# Altium PCB DDS_RIKEN_2014.PcbDoc (part 3 of 3)
Units mm, origin at the board's own origin, x right, y up, seen from the top; angles counter-clockwise.
Board outline 224 x 140 mm, 4 copper layers (TopLayer, Ground, Power, BottomLayer); 166 components, 282 nets, 1126 pads, 429 vias.
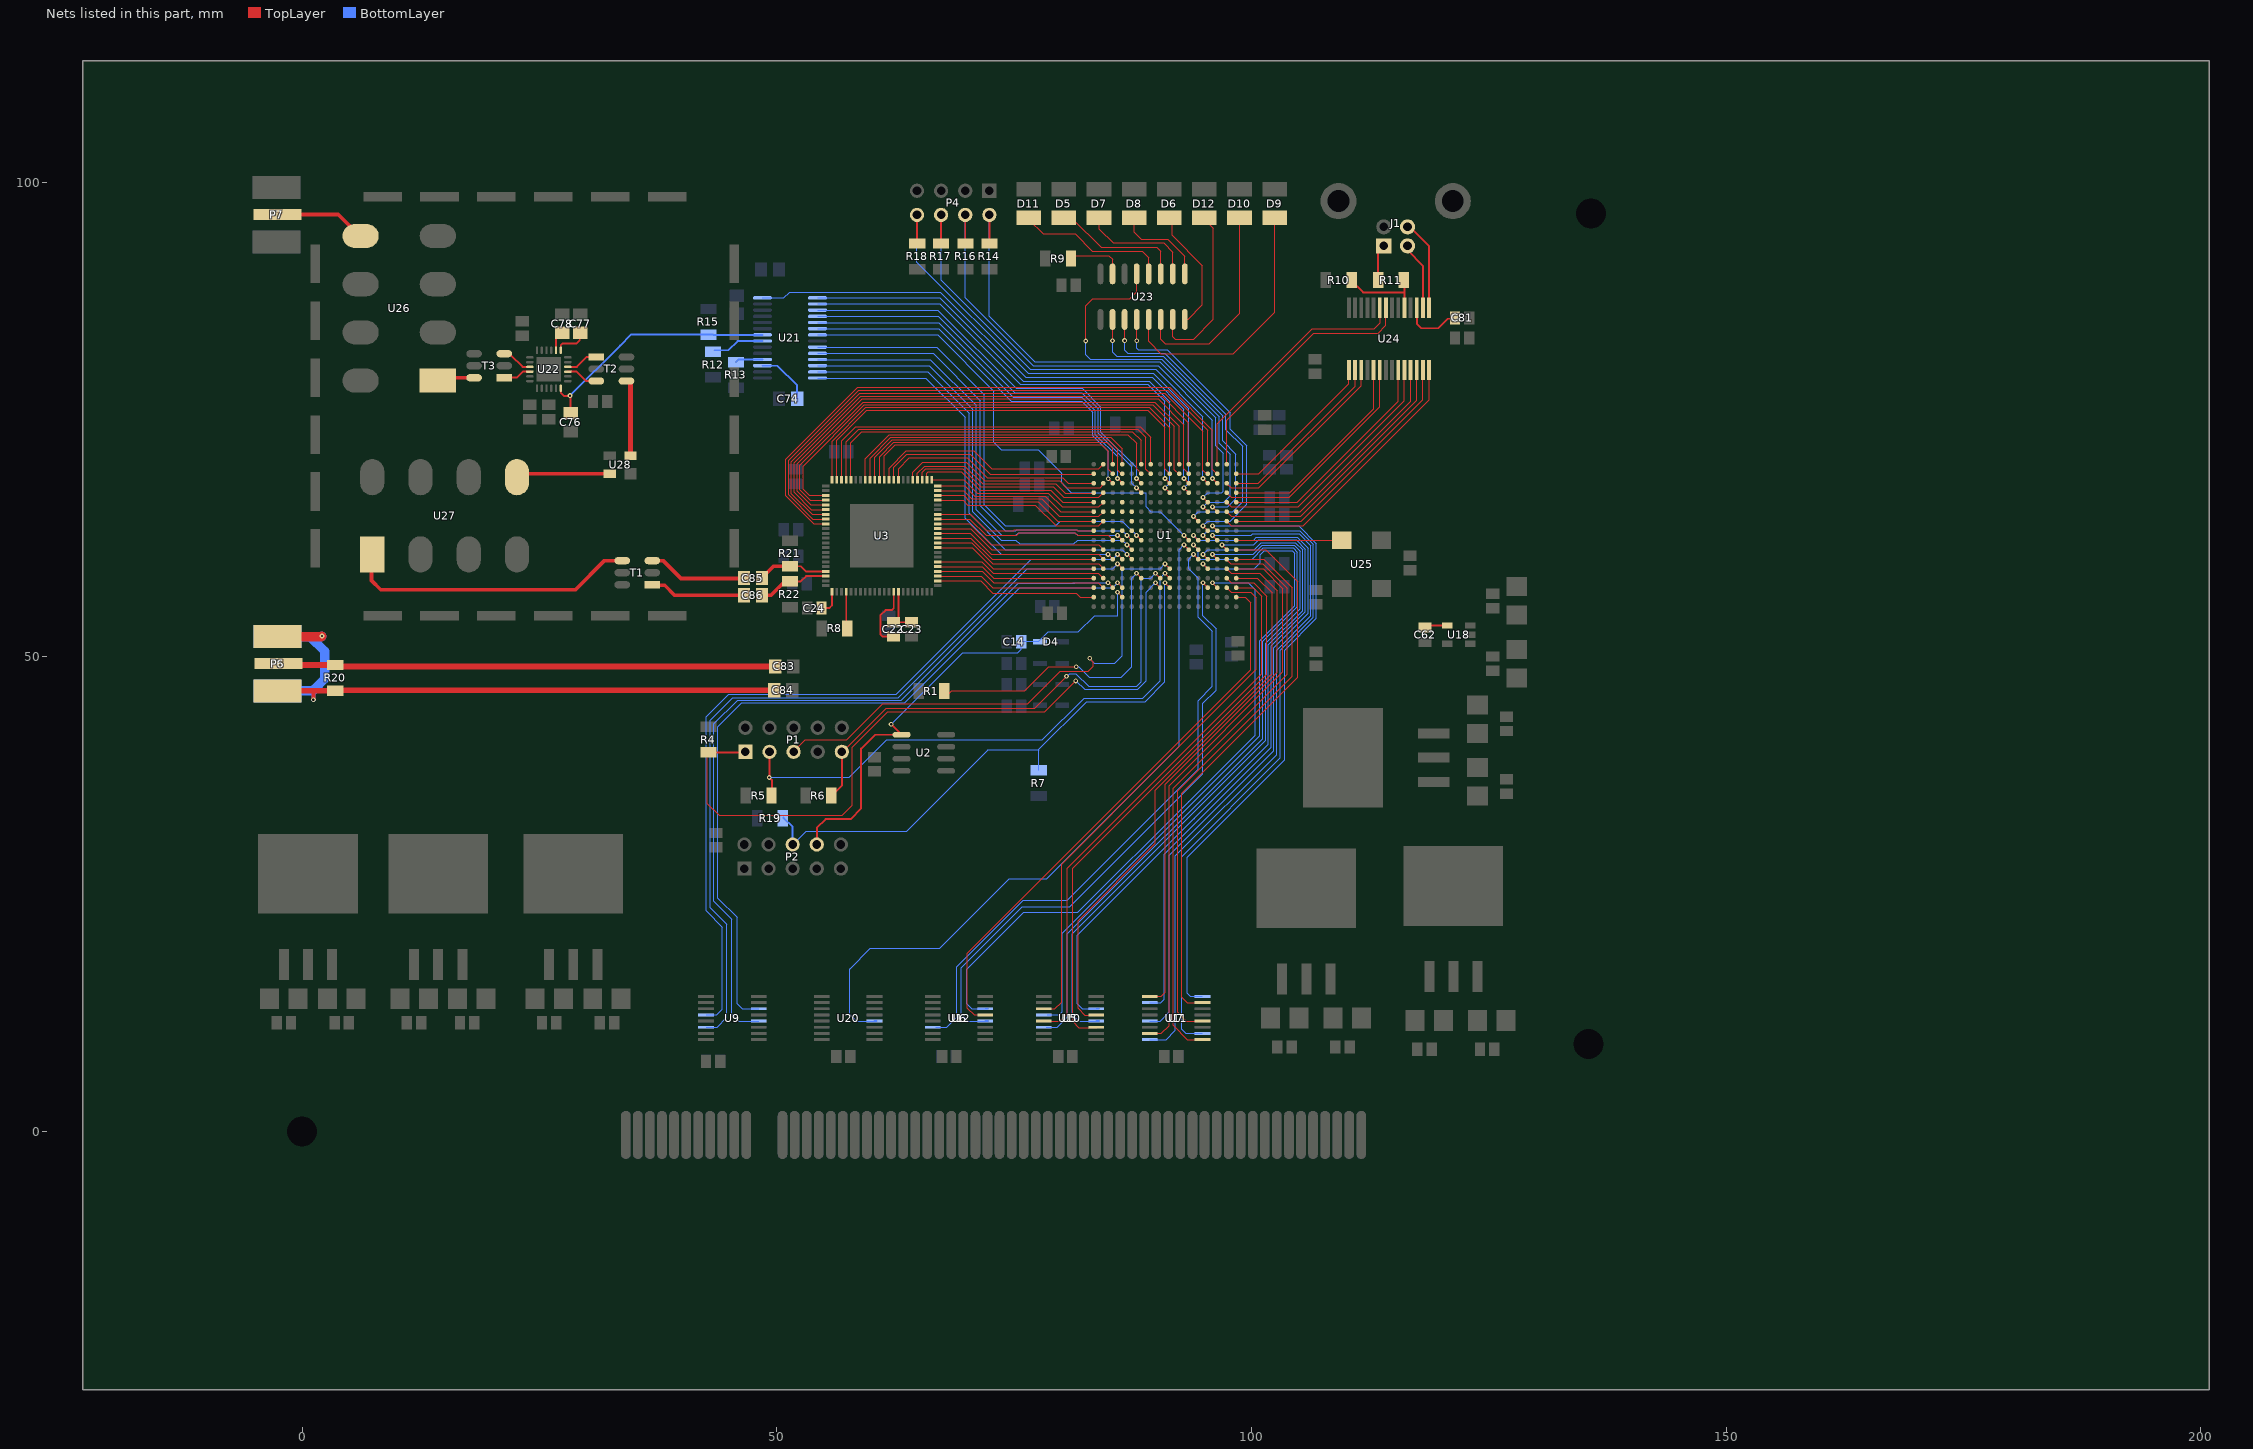
[diagram p5: the nets of this part, all layers, seen from the top]

## Via types
v1: diameter 0.5, hole 0.25, TopLayer to BottomLayer, 241 vias
v2: diameter 0.5, hole 0.25, TopLayer to BottomLayer, tented top, 114 vias
v3: diameter 1.27, hole 0.711, TopLayer to BottomLayer, 70 vias
v4: diameter 0.66, hole 0.33, TopLayer to BottomLayer, tented top, 4 vias

## Nets (pads, with @x,y where several pads share a name; then routed paths per layer and width w, separated by ;. In a path a pad name is that pad's centre, name@x,y a point inside that pad or via, vN(x,y) a via of type N, cw(c..) or ccw(c..) an arc to the next point about the centre after c; other vN are vias at no path point) (continued)
IOB3_0: U1.N3 U6.13 | length 64.2
  TopLayer w0.125: v2(94.9,57.775) U1.N3@95.4,57.275
  BottomLayer w0.125: U6.13@71.983,11.614 70.186,11.614 69.45,12.35 69.45,17.225 75.875,23.65 80.875,23.65 94.9,37.675 94.9,43.96 ; 94.9,43.65 94.9,43.96 ; v2(94.9,57.775) 94.9,54.321 96.3,52.921 96.3,46.475 94.9,45.075 94.9,43.96
  BottomLayer w0.2: U6.13@71.983,11.614 U6.13@72.282,11.614
IOB3_1: U1.P3 U6.11 | length 67.7
  TopLayer w0.125: v2(95.9,57.775) U1.P3@96.4,57.275
  BottomLayer w0.125: U6.11@71.983,12.914 70.536,12.914 70,13.45 70,17.075 76,23.075 81.725,23.075 93.547,34.897 ; 93.425,34.775 93.547,34.897 ; v2(95.9,57.775) 99.65,57.775 100.4,57.025 100.4,41.75 93.547,34.897
  BottomLayer w0.2: U6.11@71.983,12.914 U6.11@72.282,12.914
IOB3_2: U1.R3 U5.11 | length 56.8
  TopLayer w0.125: U5.11@78.182,12.889 79.264,12.889 80,13.625 80,28.15 84.909,33.059 ; U1.R3@97.4,57.275 97.9,56.775 99.925,56.775 100.5,56.2 100.5,48.65 85.875,34.025 84.909,33.059 ; 84.909,33.059 84.9,33.05 84.909,33.059
IOB3_3: U1.T3 U5.13 | length 58.3
  TopLayer w0.125: U5.13@78.182,11.589 79.789,11.589 80.6,12.4 80.6,27.7 85.234,32.334 ; 85.234,32.325 85.234,32.334 ; U1.T3@98.4,57.275 100.2,57.275 101.1,56.375 101.1,48.2 87.184,34.284 85.234,32.334
IOB3_4: U1.T2 U12.5 | length 59.3
  TopLayer w0.125: 70.075,17.4 70.075,17.284 ; U12.5@72.057,12.264 U12.5@71.983,12.264 70.786,12.264 70.075,12.975 70.075,17.284 ; U1.T2@98.375,56.275 U1.T2@98.4,56.275 99.375,56.275 99.95,55.7 99.95,48.625 81.525,30.2 70.075,18.75 70.075,17.284
IOB3_5: U1.R4 U5.3 | length 61.1
  TopLayer w0.125: U5.3@83.732,10.939 81.836,10.939 81.175,11.6 81.175,27.725 82.375,28.925 101.625,48.175 101.625,56.375 100.225,57.775 97.875,57.775 U1.R4@97.4,58.25
IOB3_6: U1.T4 U5.5 | length 59
  TopLayer w0.125: U5.5@83.732,12.239 82.461,12.239 81.75,12.95 81.75,22.175 89.9,30.325 89.9,33.359 ; 89.397,29.822 89.397,29.825 ; 89.9,33.259 89.9,33.359 ; U1.T4@98.4,58.275 100.625,58.275 102.175,56.725 102.175,48.2 101.9,47.925 89.9,35.925 89.9,33.359
IOB3_7: U1.N5 U10.5 | length 72.1
  TopLayer w0.125: v2(94.9,59.775) U1.N5@95.4,59.275
  BottomLayer w0.125: U10.5@78.5,12.275 79.75,12.275 80.1,12.625 80.1,20.875 100.875,41.65 100.875,51.675 104.575,55.375 104.575,60.9 104.3,61.175 101.375,61.175 100.95,60.75 100.95,59.9 100.325,59.275 95.4,59.275 v2(94.9,59.775)
IOB3_8: U1.N6 U10.11 | length 73.4
  TopLayer w0.125: v2(94.9,60.775) U1.N6@95.4,60.275
  BottomLayer w0.125: 81.675,16.175 81.675,20.65 94.1,33.075 ; 81.675,17.175 81.675,13.45 82.211,12.914 U10.11@83.667,12.914 ; 93.96,32.935 94.1,33.075 ; v2(94.9,60.775) 95.4,61.275 100.3,61.275 101.025,62 104.642,62 105.4,61.242 105.4,54.85 101.8,51.25 101.8,40.775 94.1,33.075
  BottomLayer w0.2: U10.11@83.667,12.914 U10.11@83.957,12.914
IOB3_9: U1.M6 U6.3 | length 67.2
  TopLayer w0.125: v2(93.9,60.775) U1.M6@94.4,60.275
  BottomLayer w0.125: U6.3@66.732,10.964 67.889,10.964 68.95,12.025 68.95,17.325 75.975,24.35 80.6,24.35 94.4,38.15 94.4,45.375 95.9,46.875 95.9,52.675 94.4,54.175 94.4,58.275 93.4,59.275 93.4,60.275 v2(93.9,60.775)
IOB3_10: U1.P6 U10.13 | length 73
  TopLayer w0.125: v2(95.9,60.775) U1.P6@96.4,60.275
  BottomLayer w0.125: 81.125,17.225 81.125,16.675 ; U10.13@83.667,11.614 81.861,11.614 81.125,12.35 81.125,16.675 ; v2(95.9,60.775) 100.197,60.775 101.147,61.725 104.528,61.725 105.125,61.128 105.125,55.05 101.5,51.425 101.5,41.175 81.125,20.8 81.125,16.675
  BottomLayer w0.2: U10.13@83.667,11.614 U10.13@83.957,11.614
IOB3_11: U1.M7 U10.3 | length 75.2
  TopLayer w0.125: v2(93.9,61.775) U1.M7@94.4,61.275
  BottomLayer w0.125: U10.3@78.407,10.964 79.564,10.964 80.625,12.025 80.625,20.8 101.2,41.375 101.2,51.6 104.85,55.25 104.85,61.014 104.414,61.45 101.261,61.45 100.086,60.275 94.4,60.275 94.4,61.275 v2(93.9,61.775)
IOB3_12: U1.R5 U7.9 | length 55.3
  TopLayer w0.125: U7.9@89.293,14.214 90.489,14.214 90.925,14.65 90.925,36.547 102.725,48.347 102.725,56.95 100.9,58.775 97.9,58.775 U1.R5@97.4,59.275
IOB3_13: U1.T5 U7.15 | length 59.1
  TopLayer w0.125: U7.15@89.293,10.314 90.514,10.314 91.325,11.125 91.325,36.425 103.325,48.425 103.325,57.15 101.225,59.25 U1.T5@98.425,59.25
IOB3_14: U1.R6 U7.1 | length 62.4
  TopLayer w0.125: U7.1@94.843,9.664 93.261,9.664 91.75,11.175 91.75,36.15 103.775,48.175 103.775,57.225 101.2,59.8 97.825,59.8 U1.R6@97.4,60.225
IOB3_15: U1.T6 U7.4 | length 59.9
  TopLayer w0.125: U7.4@94.843,11.614 93.136,11.614 92.225,12.525 92.225,35.875 104.3,47.95 104.3,57.275 101.3,60.275 U1.T6@98.4,60.275 U1.T6@98.375,60.275
IOB3_16: U1.L7 U20.13 | length 74.5
  TopLayer w0.125: v2(92.9,61.775) U1.L7@93.4,61.275
  BottomLayer w0.125: 57.7,17.125 57.7,12.35 58.436,11.614 U20.13@60.299,11.614 ; 57.725,17.15 59.875,19.3 67.175,19.3 74.5,26.625 78.45,26.625 92.4,40.575 92.4,54.71 ; 92.4,54.575 92.4,54.71 ; v2(92.9,61.775) 92.4,61.275 92.4,54.71
  BottomLayer w0.2: U20.13@60.299,11.614 U20.13@60.532,11.614
IOB3_17: U1.R7 U11.7 | length 65.4
  TopLayer w0.125: v2(96.9,61.775) U1.R7@97.4,61.275
  BottomLayer w0.125: U11.7@89.293,13.564 90.464,13.564 90.825,13.925 90.825,29.2 102.1,40.475 102.1,51.15 105.7,54.75 105.7,61.331 104.731,62.3 100.8,62.3 100.275,61.775 v2(96.9,61.775)
IOB3_18: U1.T7 U7.7 | length 59.1
  TopLayer w0.125: U7.7@94.843,13.564 93.261,13.564 92.675,14.15 92.675,35.625 104.875,47.825 104.875,57.9 101.5,61.275 U1.T7@98.4,61.275
IOB3_19: U1.L8 U21.7 | length 52.9
  TopLayer w0.125: v2(92.9,62.775) U1.L8@93.4,62.275
  BottomLayer w0.125: U21.7@54.3,83.9 66.95,83.9 72.875,77.975 72.875,75.85 ; 72.875,76.1 72.875,75.85 ; v2(92.9,62.775) 90.4,65.275 89.4,65.275 88.9,65.775 88.9,67.275 81.05,67.275 80.025,68.3 80.025,69.3 77.525,71.8 73.65,71.8 72.875,72.575 72.875,75.85
IOB3_20: U1.M8 U11.4 | length 72.1
  TopLayer w0.125: v2(93.9,62.775) U1.M8@94.4,62.275
  BottomLayer w0.125: U11.4@89.293,11.614 90.389,11.614 91.35,12.575 91.35,15.4 ; 91.35,16.55 91.35,15.4 ; v2(93.9,62.775) 94.4,62.275 100.225,62.275 100.525,62.575 104.845,62.575 105.975,61.445 105.975,54.55 102.375,50.95 102.375,40.1 91.35,29.075 91.35,15.4
IOB3_21: U1.N8 U11.15 | length 72.9
  TopLayer w0.125: v2(94.9,62.775) U1.N8@95.4,62.275
  BottomLayer w0.125: 92.65,16.55 92.65,16.075 ; 92.65,26.525 92.65,26.475 ; U11.15@94.843,10.314 93.086,10.314 92.65,10.75 92.65,16.075 ; v2(94.9,62.775) 95.4,63.275 105.075,63.275 106.525,61.825 106.525,54.15 103.05,50.675 103.05,39.35 92.65,28.95 92.65,26.475 ; 92.65,16.075 92.65,26.475
IOB3_22: U1.P8 U11.1 | length 72.1
  TopLayer w0.125: v2(95.9,62.775) U1.P8@96.4,62.275
  BottomLayer w0.125: U11.1@89.293,9.664 91.014,9.664 92,10.65 92,16.133 ; 92,16.55 92,16.133 ; 92,29 92,16.133 ; 92,29.025 102.65,39.675 102.65,50.7 106.25,54.3 106.25,61.7 105.025,62.925 100.15,62.925 100,62.775 v2(95.9,62.775)
IOB4_0: U1.N9 U23.4 | length 32.3
  TopLayer w0.125: v1(87.915,83.29) U23.4@87.915,85.525 ; v2(94.9,63.775) U1.N9@95.4,63.275
  BottomLayer w0.125: v1(87.915,83.29) 87.915,82.485 88.075,82.325 91.125,82.325 97.75,75.7 97.75,73.975 99.525,72.2 99.525,66.05 97.75,64.275 95.4,64.275 v2(94.9,63.775)
IOB4_1: U1.R10 U24.14 | length 30.2
  TopLayer w0.125: U1.R10@97.4,64.25 97.875,63.775 105.45,63.775 118.725,77.05 U24.14@118.725,80.2
IOB4_2: U1.T10 U24.13 | length 28.1
  TopLayer w0.125: U1.T10@98.4,64.275 105.275,64.275 118.075,77.075 U24.13@118.075,80.2
IOB4_3: U1.R11 U24.12 | length 28.5
  TopLayer w0.125: U1.R11@97.4,65.275 97.9,64.775 105.2,64.775 117.425,77 U24.12@117.425,80.2
IOB4_4: U1.T11 U24.11 | length 26.5
  TopLayer w0.125: U1.T11@98.4,65.275 105.125,65.275 116.775,76.925 U24.11@116.775,80.2
IOB4_5: U1.R12 U24.10 | length 26.8
  TopLayer w0.125: U1.R12@97.425,66.25 97.9,65.775 104.95,65.775 116.125,76.95 U24.10@116.125,80.2
IOB4_6: U1.T12 U24.9 | length 24.8
  TopLayer w0.125: U1.T12@98.4,66.25 104.825,66.25 115.475,76.9 U24.9@115.475,80.2
IOB4_7: U1.P9 U11.9 | length 67.1
  TopLayer w0.125: v2(95.9,63.775) U1.P9@96.4,63.275
  BottomLayer w0.125: U11.9@94.843,14.214 93.586,14.214 93.25,14.55 93.25,28.875 103.5,39.125 103.5,50.675 106.85,54.025 106.85,61.889 104.964,63.775 v2(95.9,63.775)
IOB4_8: U1.P11 U23.2 | length 30.7
  TopLayer w0.125: v1(85.375,83.275) U23.2@85.375,85.525 ; v2(95.9,65.775) U1.P11@96.4,65.275
  BottomLayer w0.125: v1(85.375,83.275) 85.375,82.075 85.8,81.65 90.725,81.65 96.975,75.4 96.975,72.725 98.375,71.325 98.375,66.625 97.525,65.775 v2(95.9,65.775)
IOB4_9: U1.R13 U24.6 | length 24.2
  TopLayer w0.125: U1.R13@97.375,67.275 97.875,66.775 103.975,66.775 113.525,76.325 U24.6@113.525,80.2
IOB4_10: U1.T13 U24.5 | length 22.2
  TopLayer w0.125: U1.T13@98.4,67.275 104.05,67.275 112.875,76.1 U24.5@112.875,80.2
IOB4_11: U1.M10 U23.3 | length 33.2
  TopLayer w0.125: v1(86.645,83.295) U23.3@86.645,85.525 ; v2(93.9,64.775) U1.M10@94.4,64.275
  BottomLayer w0.125: v1@86.65,83.325 86.65,82.3 86.975,81.975 90.9,81.975 97.325,75.55 97.325,73.9 99.075,72.15 99.075,66.3 98.05,65.275 94.4,65.275 v2(93.9,64.775)
IOB4_12: U1.N11 U23.13 | length 42.7
  TopLayer w0.125: v1(82.55,83.25) 82.55,86.95 83.3,87.7 87.2,87.7 87.915,88.415 U23.13@87.915,90.325 ; v2(94.9,65.775) U1.N11@95.4,65.275
  BottomLayer w0.125: v1(82.55,83.25) 82.55,81.825 83.05,81.325 90.55,81.325 96.6,75.275 96.6,72.5 97.8,71.3 97.8,66.95 97.1,66.25 95.4,66.25 v2@94.925,65.775
IOB4_13: U1.T14 U24.2 | length 18.5
  TopLayer w0.125: U1.T14@98.4,68.25 100.7,68.25 110.925,78.475 U24.2@110.925,80.2
IOB4_14: U1.T15 U24.1 | length 17.3
  TopLayer w0.125: U1.T15@98.375,69.275 U1.T15@98.4,69.275 100.8,69.275 110.275,78.75 U24.1@110.275,80.2
IOB4_15: P4.2 R14.1 U1.N12 | length 53.2
  TopLayer w0.125: v2(94.9,66.775) U1.N12@95.4,66.275
  TopLayer w0.2: R14.1@72.4,93.525 P4.2@72.4,96.535
  BottomLayer w0.125: P4.2@72.4,96.535 72.4,85.85 77.2,81.05 90.35,81.05 96.25,75.15 96.25,72.225 97.05,71.425 97.05,71.325 97.05,67.425 96.9,67.275 95.4,67.275 v2(94.9,66.775)
IOB4_16: P4.4 R16.1 U1.P14 | length 50.2
  TopLayer w0.125: v2(95.9,68.775) U1.P14@96.4,68.275
  TopLayer w0.2: R16.1@69.86,93.465 P4.4@69.86,96.535
  BottomLayer w0.125: P4.4@69.86,96.535 69.86,87.79 77,80.65 90.175,80.65 95.9,74.925 95.9,73.1 ; v2(95.9,68.775) 95.9,71.75 ; 95.9,71.825 95.9,71.75 ; 95.9,73.214 95.9,73.1 ; 95.9,71.75 95.9,73.1
IOB4_17: U1.R14 U24.3 | length 20.4
  TopLayer w0.125: U1.R14@97.425,68.225 97.875,67.775 100.8,67.775 111.575,78.55 U24.3@111.575,80.2
IOB5_0: P4.6 R17.1 U1.N14 | length 50.9
  TopLayer w0.125: v2(94.9,68.775) U1.N14@95.4,68.275
  TopLayer w0.2: R17.1@67.32,93.505 P4.6@67.32,96.535
  BottomLayer w0.125: P4.6@67.32,96.535 67.32,89.63 76.7,80.25 89.925,80.25 94.9,75.275 94.9,73.575 ; v2(94.9,68.775) 94.9,73.575 ; 94.9,73.825 94.9,73.575
IOB5_1: U1.P15 U3.31 | length 64.1
  TopLayer w0.125: U3.31@55.178,63.989 53.89,63.989 50.95,66.929 50.95,70.796 58.529,78.375 91.4,78.375 95.9,73.875 95.9,69.725 U1.P15@96.4,69.225
IOB5_2: U1.P16 U24.23 | length 27.3
  TopLayer w0.125: U1.P16@96.4,70.275 96.4,74.55 106.4,84.55 112.95,84.55 113.55,85.15 U24.23@113.55,86.675
IOB5_3: U1.R16 U24.22 | length 27.2
  TopLayer w0.125: U1.R16@97.4,70.275 97.4,74.9 106.575,84.075 113.35,84.075 114.175,84.9 U24.22@114.175,86.55
IOB5_4: U1.N16 U3.30 | length 61.1
  TopLayer w0.125: U3.30@55.178,64.489 53.815,64.489 51.25,67.054 51.25,70.671 58.629,78.05 91.175,78.05 95.4,73.825 U1.N16@95.4,70.25
IOB5_5: U1.N15 U3.29 | length 60.6
  TopLayer w0.125: U3.29@55.178,64.989 55.167,65 53.728,65 51.55,67.178 51.55,70.547 58.728,77.725 90.9,77.725 94.9,73.725 94.9,69.65 95.275,69.275 U1.N15@95.4,69.275 U1.N15@95.425,69.275
IOB5_6: U1.L14 U21.28 | length 57.9
  TopLayer w0.125: v2(92.9,68.775) U1.L14@93.4,68.275
  BottomLayer w0.125: U21.28@48.5,87.8 50.75,87.8 51.35,88.4 67.25,88.4 76.225,79.425 89.55,79.425 92.9,76.075 92.9,73.075 ; v2(92.9,68.775) 92.9,73.075 ; 92.9,73.2 92.9,73.075
IOB5_7: P4.8 R18.1 U1.L13 | length 52.4
  TopLayer w0.125: v2(92.9,67.775) U1.L13@93.4,67.275
  TopLayer w0.2: R18.1@64.78,93.47 P4.8@64.78,96.535
  BottomLayer w0.125: P4.8@64.775,96.525 64.775,91.55 76.475,79.85 89.675,79.85 93.4,76.125 93.4,73.111 ; v2(92.9,67.775) 93.4,68.275 93.4,73.111 ; 93.4,73.2 93.4,73.111
IOB5_8: U1.L16 U3.28 | length 57.2
  TopLayer w0.125: U3.28@55.178,65.489 53.663,65.489 51.85,67.302 51.85,70.423 58.852,77.425 90.6,77.425 93.375,74.65 U1.L16@93.375,70.25
IOB5_9: U1.L15 U3.27 | length 56.5
  TopLayer w0.125: U3.27@55.178,65.989 53.587,65.989 52.15,67.426 52.15,70.299 59.001,77.15 90.2,77.15 92.9,74.45 92.9,69.775 U1.L15@93.375,69.3
IOB5_10: U1.K16 U3.26 | length 53.6
  TopLayer w0.125: U3.26@55.178,66.489 53.512,66.489 52.475,67.526 52.475,67.55 52.45,67.575 52.45,70.174 59.101,76.825 89.825,76.825 92.4,74.25 U1.K16@92.4,70.25
IOB5_11: U1.K15 U3.25 | length 53.1
  TopLayer w0.125: U3.25@55.178,66.989 55.167,67 53.425,67 52.775,67.65 52.775,70.075 59.225,76.525 89.625,76.525 91.9,74.25 91.9,69.7 92.325,69.275 U1.K15@92.4,69.275 U1.K15@92.425,69.275
IOB5_12: U1.J16 U3.22 | length 45.8
  TopLayer w0.125: U3.22@55.83,68.641 55.83,72.705 59.375,76.25 89.25,76.25 91.4,74.1 91.4,70.35 U1.J16@91.375,70.325
IOB5_13: U1.J15 U3.21 | length 45.8
  TopLayer w0.125: U3.21@56.33,68.641 56.33,72.78 59.5,75.95 89.1,75.95 90.9,74.15 90.9,69.775 U1.J15@91.375,69.3
IOB5_14: U1.J14 U21.2 | length 49.9
  TopLayer w0.125: v2(90.9,68.775) U1.J14@91.4,68.275
  BottomLayer w0.125: U21.2@54.3,87.15 67.2,87.15 75.65,78.7 89.1,78.7 90.9,76.9 90.9,73.9 ; v2(90.9,68.775) 90.9,73.9 ; 90.9,74.15 90.9,73.9
IOB5_15: U1.J13 U21.1 | length 51.7
  TopLayer w0.125: v2(90.9,67.775) U1.J13@91.4,67.275
  BottomLayer w0.125: U21.1@54.3,87.8 67.175,87.8 75.95,79.025 89.225,79.025 91.4,76.85 91.4,74.15 ; v2(90.9,67.775) 91.4,68.275 91.4,74.15 ; 91.4,74.225 91.4,74.15
IOB6_0: U1.G16 U3.20 | length 40.6
  TopLayer w0.125: U3.20@56.83,68.641 56.83,72.73 58.325,74.225 88.3,74.225 89.4,73.125 89.4,70.3 U1.G16@89.35,70.25
IOB6_1: U1.G15 U3.19 | length 40.5
  TopLayer w0.125: U3.19@57.33,68.641 57.33,72.655 58.625,73.95 88.05,73.95 88.9,73.1 88.9,69.725 89.325,69.3 U1.G15@89.4,69.3
IOB6_2: U1.F13 U21.4 | length 44.3
  TopLayer w0.125: v2(87.9,67.775) U1.F13@88.4,67.275
  BottomLayer w0.125: U21.4@54.3,85.85 67.025,85.85 75.05,77.825 82.125,77.825 83.85,76.1 83.85,73.55 87.4,70 87.4,68.275 v2(87.9,67.775)
IOB6_3: U1.F16 U3.18 | length 37.8
  TopLayer w0.125: U3.18@57.83,68.641 57.825,68.646 57.825,72.525 58.975,73.675 87.475,73.675 88.375,72.775 88.375,70.35 U1.F16@88.425,70.3
IOB6_4: U1.F15 U3.15 | length 35.6
  TopLayer w0.125: U3.15@59.33,68.641 59.33,70.852 61.878,73.4 86.975,73.4 87.9,72.475 87.9,70.482 87.9,69.775 U1.F15@88.4,69.275
IOB6_5: U1.B16 U3.10 | length 25.5
  TopLayer w0.125: U3.10@61.83,68.641 61.83,69.854 63.651,71.675 70.775,71.675 72.675,69.775 83.9,69.775 U1.B16@84.375,70.25
IOB6_6: U1.F14 U21.3 | length 43.8
  TopLayer w0.125: v2(87.9,68.775) U1.F14@88.4,68.275
  BottomLayer w0.125: U21.3@54.3,86.5 66.975,86.5 75.225,78.25 82.175,78.25 84.15,76.275 84.15,73.65 87.9,69.9 v2(87.9,68.775)
IOB6_7: U1.D16 U3.14 | length 31.9
  TopLayer w0.125: U3.14@59.83,68.641 59.83,70.928 62.027,73.125 85.175,73.125 86.4,71.9 U1.D16@86.4,70.25
IOB6_8: U1.D15 U3.13 | length 32
  TopLayer w0.125: U3.13@60.33,68.641 60.33,71.004 62.176,72.85 84.924,72.85 85.9,71.874 85.9,69.65 86.275,69.275 U1.D15@86.375,69.275
IOB6_9: U1.C16 U3.12 | length 29.6
  TopLayer w0.125: U3.12@60.83,68.641 60.83,71.079 62.326,72.575 84.775,72.575 85.375,71.975 85.375,70.3 U1.C16@85.35,70.275
IOB6_10: U1.C15 U3.11 | length 29.4
  TopLayer w0.125: U3.11@61.33,68.641 61.33,71.155 62.475,72.3 84.25,72.3 84.9,71.65 84.9,69.75 U1.C15@85.375,69.275
IOB7_0: U1.C14 U21.6 | length 41
  TopLayer w0.125: v2(84.925,68.75) U1.C14@85.4,68.275
  BottomLayer w0.125: U21.6@54.3,84.55 67.05,84.55 74.7,76.9 82.125,76.9 83.3,75.725 83.3,75.475 83.3,73.25 84.925,71.625 v2(84.925,68.75)
IOB7_1: U1.D14 U21.5 | length 41.9
  TopLayer w0.125: v2(85.9,68.775) U1.D14@86.4,68.275
  BottomLayer w0.125: U21.5@54.3,85.2 67.05,85.2 74.9,77.35 82.125,77.35 83.575,75.9 83.575,73.364 85.9,71.039 v2(85.9,68.775)
IOB7_2: U1.D11
IOB7_3: U1.D12
IOB7_4: U1.A13 U3.4 | length 20.7
  TopLayer w0.125: U3.4@64.83,68.641 64.83,69.33 65.575,70.075 69.825,70.075 71.7,68.2 79.4,68.2 80.375,67.225 U1.A13@83.375,67.225
IOB7_5: U1.B13 U3.3 | length 21.4
  TopLayer w0.125: U3.3@65.33,68.641 65.33,69.405 65.7,69.775 69.574,69.775 71.474,67.875 79.125,67.875 80.225,66.775 83.9,66.775 U1.B13@84.4,67.275
IOB7_6: U1.A14 U3.8 | length 23.3
  TopLayer w0.125: U3.8@62.83,68.641 62.83,69.805 63.975,70.95 70.075,70.95 72.175,68.85 80.144,68.85 80.719,68.275 83.375,68.275 U1.A14@83.4,68.25
IOB7_7: U1.B14 U3.5 | length 22.6
  TopLayer w0.125: U3.5@64.33,68.641 64.33,69.43 65.375,70.475 69.975,70.475 71.925,68.525 79.8,68.525 80.513,67.812 84.062,67.812 84.4,68.15 U1.B14@84.4,68.225
IOB7_8: U1.E11
IOB7_9: U1.E10
IOB7_10: U1.A12 U3.2 | length 19.6
  TopLayer w0.125: U3.2@65.83,68.641 65.83,69.33 65.975,69.475 69.45,69.475 71.375,67.55 78.875,67.55 80.15,66.275 U1.A12@83.375,66.275
IOB7_11: U1.B12 U3.1 | length 19.4
  TopLayer w0.125: U3.1@66.33,68.641 69.709,68.641 71.125,67.225 78.625,67.225 80.075,65.775 83.925,65.775 U1.B12@84.375,66.225
IOB7_12: U1.A11 U3.88 | length 17.6
  TopLayer w0.125: U3.88@66.982,67.989 69.786,67.989 70.85,66.925 78.275,66.925 79.925,65.275 U1.A11@83.4,65.275 U1.A11@83.425,65.25
IOB7_13: U1.B11 U3.87 | length 18.7
  TopLayer w0.125: U3.87@66.982,67.489 69.686,67.489 70.55,66.625 77.925,66.625 79.775,64.775 83.925,64.775 84.375,65.225 U1.B11@84.375,65.25
IOB7_14: U1.C11
IOB7_15: U1.A15 U3.9 | length 23.8
  TopLayer w0.125: U3.9@62.33,68.641 62.33,69.93 63.7,71.3 70.375,71.3 72.475,69.2 83.35,69.2 U1.A15@83.4,69.25
IOB7_16: U1.F9
IOB7_17: U1.A10 U3.86 | length 17.6
  TopLayer w0.125: U3.86@66.982,66.989 69.686,66.989 70.35,66.325 77.525,66.325 79.6,64.25 U1.A10@83.4,64.25
IOB7_18: U1.B10 U3.85 | length 18.7
  TopLayer w0.125: U3.85@66.982,66.489 69.636,66.489 70.15,65.975 77.25,65.975 79.45,63.775 83.9,63.775 U1.B10@84.4,64.275
IOB7_19: U1.C9
IOB7_20: U1.D9
IOB7_21: U1.E9
IOB8_0: U1.C8 U3.81 | length 19.6
  TopLayer w0.125: U3.81@66.982,64.489 70.336,64.489 72.05,62.775 75.263,62.775 75.563,63.075 81.388,63.075 81.687,62.775 84.9,62.775 U1.C8@85.4,62.275
IOB8_1: U1.D8 U21.11 | length 46.8
  TopLayer w0.125: v2(85.9,62.775) U1.D8@86.4,62.275
  BottomLayer w0.125: U21.11@54.3,81.3 66.2,81.3 71,76.5 71,74.075 ; 71,74.15 71,74.075 ; v2(85.9,62.775) 81.7,62.775 81.4,63.075 75.5,63.075 75.2,62.775 73.7,62.775 71,65.475 71,74.075
IOB8_2: U1.E8 U21.10 | length 47.9
  TopLayer w0.125: v2(86.9,62.775) U1.E8@87.4,62.275
  BottomLayer w0.125: U21.10@54.3,81.95 66.475,81.95 71.45,76.975 71.45,74.1 ; 71.45,74.15 71.45,74.1 ; v2(86.9,62.775) 86.4,63.275 81.7,63.275 81.6,63.375 75.3,63.375 75.2,63.275 74.05,63.275 71.45,65.875 71.45,74.1
IOB8_3: U1.F8 U21.9 | length 50
  TopLayer w0.125: v2(87.9,62.775) U1.F8@88.4,62.275
  BottomLayer w0.125: U21.9@54.3,82.6 66.85,82.6 71.875,77.575 71.875,77.111 ; 71.875,74.15 71.875,74.011 ; 71.875,77.275 71.875,77.111 ; v2(87.9,62.775) 86.4,64.275 79.875,64.275 79.375,63.775 74.1,63.775 71.875,66 71.875,74.011 ; 71.875,74.011 71.875,77.111
IOB8_4: U1.A7 U3.79 | length 17.3
  TopLayer w0.125: U3.79@66.982,63.489 70.436,63.489 72.65,61.275 83.375,61.275 U1.A7@83.4,61.25
IOB8_5: U1.B7 U3.80 | length 18.5
  TopLayer w0.125: U3.80@66.982,63.989 70.36,63.989 72.574,61.775 83.9,61.775 U1.B7@84.4,61.275
IOB8_6: U1.C6 U21.14 | length 45.3
  TopLayer w0.125: v2(84.9,60.775) U1.C6@85.4,60.275
  BottomLayer w0.125: U21.14@54.3,79.35 65.7,79.35 69.85,75.2 69.85,73.875 ; 69.85,73.986 69.85,73.875 ; v2(84.9,60.775) 73.675,60.775 69.85,64.6 69.85,73.875
IOB8_7: U1.A6 U3.77 | length 17.3
  TopLayer w0.125: U3.77@66.982,62.489 70.46,62.489 72.699,60.25 U1.A6@83.4,60.25
IOB8_8: U1.B6 U3.78 | length 18.5
  TopLayer w0.125: U3.78@66.982,62.989 70.411,62.989 72.625,60.775 83.9,60.775 U1.B6@84.4,60.275
IOB8_9: U1.E7 U21.12 | length 47.9
  TopLayer w0.125: v2(86.9,61.775) U1.E7@87.4,61.275
  BottomLayer w0.125: U21.12@54.3,80.65 66.05,80.65 70.65,76.05 70.65,73.8 ; 70.65,73.911 70.65,73.8 ; v2(86.9,61.775) 86.4,62.275 81.7,62.275 81.3,61.875 75.6,61.875 75.2,62.275 73.65,62.275 70.65,65.275 70.65,73.8
IOB8_10: U1.E6 U21.13 | length 47.5
  TopLayer w0.125: v2(86.9,60.775) U1.E6@87.4,60.275
  BottomLayer w0.125: U21.13@54.3,80 65.925,80 70.275,75.65 70.275,73.975 70.275,65.1 74.1,61.275 86.4,61.275 v2(86.9,60.775)
IOB8_11: U1.A5 U3.75 | length 17.3
  TopLayer w0.125: U3.75@66.982,61.489 70.611,61.489 72.825,59.275 83.35,59.275 U1.A5@83.375,59.25
IOB8_12: U1.B5 U3.76 | length 18.5
  TopLayer w0.125: U3.76@66.982,61.989 70.535,61.989 72.749,59.775 83.9,59.775 U1.B5@84.4,59.275
IOB8_13: U1.D6 U9.5 | length 85.3
  TopLayer w0.125: v2(85.9,60.775) U1.D6@86.4,60.275
  BottomLayer w0.125: U9.5@42.557,12.264 43.664,12.264 44.275,12.875 44.275,17.009 ; 44.275,17.175 44.275,17.009 ; 81.15,60.275 81.7,60.275 ; v2(85.9,60.775) 85.4,60.275 81.7,60.275 ; 44.275,17.009 44.275,21.525 42.575,23.225 42.575,43.675 44.925,46.025 62.575,46.025 76.825,60.275 81.7,60.275
IOB8_14: U1.A4 U3.71 | length 17
  TopLayer w0.125: U3.71@66.982,59.489 71.636,59.489 72.85,58.275 83.425,58.275 U1.A4@83.45,58.25
IOB8_15: U1.B4 U3.72 | length 18.1
  TopLayer w0.125: U3.72@66.982,59.989 71.611,59.989 72.825,58.775 83.85,58.775 U1.B4@84.375,58.25
IOB8_16: U1.A2 U3.68 | length 17.1
  TopLayer w0.125: U3.68@66.982,57.989 71.486,57.989 72.775,56.7 81.55,56.7 81.975,56.275 83.325,56.275 U1.A2@83.375,56.225
IOB8_17: U1.A3 U3.69 | length 16.9
  TopLayer w0.125: U3.69@66.982,58.489 71.561,58.489 72.775,57.275 U1.A3@83.4,57.275
IOB8_18: U1.D5 U9.3 | length 86
  TopLayer w0.125: v2(85.9,59.775) U1.D5@86.4,59.275
  BottomLayer w0.125: U9.3@42.557,10.964 43.714,10.964 44.75,12 44.75,16.475 ; 44.75,17.2 44.75,16.475 ; 81.125,59.275 81.284,59.275 ; v2(85.9,59.775) 85.4,59.275 81.284,59.275 ; 44.75,16.475 44.75,21.825 43,23.575 43,43.325 45.375,45.7 62.825,45.7 76.4,59.275 81.284,59.275
IOB8_19: U1.B3 U3.70 | length 18.1
  TopLayer w0.125: U3.70@66.982,58.989 71.636,58.989 72.85,57.775 83.875,57.775 U1.B3@84.375,57.275
IOB8_20: U1.C3 U9.13 | length 83.2
  TopLayer w0.125: v2(84.9,57.775) U1.C3@85.4,57.275
  BottomLayer w0.125: 45.275,17.225 45.275,17.159 ; U9.13@48.107,11.614 46.011,11.614 45.275,12.35 45.275,17.159 ; 81.175,57.775 v2(84.9,57.775) ; 81.4,57.75 75.45,57.75 63.125,45.425 45.875,45.425 43.375,42.925 43.375,24.225 45.275,22.325 45.275,17.159
IOB8_21: U1.D3 U9.11 | length 82.5
  TopLayer w0.125: v2(85.9,57.775) U1.D3@86.4,57.275
  BottomLayer w0.125: 45.825,17.175 45.825,16.35 ; U9.11@48.107,12.914 46.361,12.914 45.825,13.45 45.825,16.35 ; 81.125,57.275 81.209,57.275 ; v2(85.9,57.775) 85.4,57.275 81.209,57.275 ; 45.825,16.35 45.825,22.55 43.8,24.575 43.8,42.625 46.325,45.15 63.5,45.15 75.625,57.275 81.209,57.275
IOUT+: C85.2 R21.1 U3.41 | length 7.5
  TopLayer w0.2: R21.1@51.425,59.525 52.525,59.525 53.061,58.989 U3.41@55.178,58.989
  TopLayer w0.4: C85.2@48.425,58.3 49.65,59.525 R21.1@51.4,59.525
IOUT-: C86.2 R22.2 U3.42 | length 7.4
  TopLayer w0.2: C86.2@48.425,56.475 C86.2@48.45,56.475 ; R22.2@50.85,57.925 R22.2@51.4,57.925 ; R22.2@51.6,57.925 52.525,57.925 53.089,58.489 U3.42@55.178,58.489
  TopLayer w0.4: C86.2@48.45,56.475 49.4,56.475 R22.2@50.85,57.925
NCE: P2.6 R7.1 R19.2 U1.J3 | length 62.9
  TopLayer w0.125: v2(90.9,57.775) U1.J3@91.4,57.275
  BottomLayer w0.125: P2.6@51.675,30.2 53.1,31.625 63.709,31.625 72.259,40.175 ; 72.2,40.175 72.259,40.175 ; R7.1@77.6,38.025 77.6,40.15 77.575,40.175 ; v2(90.9,57.775) 90.9,47.375 88.8,45.275 82.675,45.275 77.575,40.175 ; 72.259,40.175 77.575,40.175
  BottomLayer w0.2: R19.2@50.7,33.05 51.68,32.07 P2.6@51.68,30.215
NCS: C14.1 D4.1 P2.8 U1.D2 U2.1 | length 52.3
  TopLayer w0.125: v2(85.9,56.775) U1.D2@86.4,56.275
  TopLayer w0.2: P2.8@54.225,30.225 54.225,31.975 55.15,32.9 57.775,32.9 58.9,34.025 58.9,40.325 60.355,41.78 U2.1@63.15,41.78 v1(62.05,42.88)
  BottomLayer w0.125: v1@62.05,42.875 69.6,50.425 75.375,50.425 75.75,50.8 C14.1@75.75,51.575 ; C14.1@75.7,51.525 C14.1@75.75,51.575 ; v2(85.9,56.775) 85.9,54.325 83.5,54.325 81.775,52.6 78.625,52.6 77.625,51.6 75.775,51.6 C14.1@75.75,51.575
NetC22_1: C22.1 U3.58 | length 6.9
  TopLayer w0.2: C22.1@62.3,52.125 61.175,52.125 60.925,52.375 60.925,54.35 61.475,54.9 62.1,54.9 62.325,55.125 U3.58@62.325,56.85
NetC22_2: C22.2 C23.1 U3.59 | length 5
  TopLayer w0.2: C22.2@62.3,53.625 C23.1@64.2,53.625 ; C22.2@62.83,53.695 U3.59@62.83,56.837
NetC24_2: C24.2 U3.45 | length 2.7
  TopLayer w0.2: C24.2@54.718,55.119 55.544,55.119 55.825,55.4 U3.45@55.825,56.875
NetC62_2: C62.2 U18.4 | length 2.5
  TopLayer w0.2: C62.2@118.298,53.068 118.505,53.275 U18.4@120.7,53.275
NetC74_2: C74.2 U21.17 | length 6.1
  BottomLayer w0.2: U21.17@48.5,80.65 50.075,80.65 52.15,78.575 C74.2@52.15,77.175 C74.2@52.15,77.025
NetC76_1: C76.1 R15.2 U21.22 U22.24 | length 26.4
  TopLayer w0.2: U22.24@27.25,78.275 27.25,77.8 27.575,77.475 v1@28.225,77.475 ; v1(28.225,77.5) 28.3,77.425 C76.1@28.3,75.625
  BottomLayer w0.125: R15.2@43.3,83.925 R15.2@43.325,83.9
  BottomLayer w0.2: v1@28.25,77.525 33.5,82.775 34.65,83.925 R15.2@43.3,83.925 ; R15.2@43.325,83.9 U21.22@48.5,83.9
NetC77_2: C77.2 U22.7 | length 3.5
  TopLayer w0.2: U22.7@27.25,82.275 27.25,82.8 27.425,82.975 28.875,82.975 29.25,83.35 C77.2@29.25,84.1
NetC78_2: C78.2 U22.8 | length 2.1
  TopLayer w0.2: U22.8@26.75,82.275 26.75,83.7 C78.2@27.2,84.15
NetC81_1: C81.1 U24.17 | length 6.4
  TopLayer w0.2: U24.17@117.425,86.75 117.425,85.05 117.875,84.6 119.7,84.6 120.7,85.6 C81.1@121.525,85.6
NetC83_2: C83.2 P6.1 R20.2 | length 52.4
  TopLayer w0.2: P6.1@-2.425,49.3 P6.1@-2.25,49.125 ; R20.2@3.475,49.05 R20.2@3.55,48.975
  TopLayer w0.6: P6.1@-2.25,49.125 R20.2@3.5,49.125 ; R20.2@3.55,48.975 C83.2@49.85,48.975
NetC84_2: C84.2 P6.2 R20.1 | length 77.7
  TopLayer w0.2: P6.2@-2.6,46.4 P6.2@-2.575,46.425 ; R20.1@3.625,46.425 R20.1@3.675,46.475
  TopLayer w0.4: v1(1.2,45.475) 1.2,46.425
  TopLayer w0.6: P6.2@-2.575,46.425 1.2,46.425 R20.1@3.5,46.425 ; R20.1@3.675,46.475 C84.2@49.75,46.475
  TopLayer w1: P6.2@-2.59,52.115 2.04,52.115 v1(2.1,52.175)
  BottomLayer w0.4: v1(1.2,45.475) 1.2,46.475 1.3,46.575
  BottomLayer w1: P6.2@-2.6,52.075 0.9,52.075 2.4,50.575 2.4,47.675 1.3,46.575 ; P6.2@-2.59,46.395 1.12,46.395 1.2,46.475 ; P6.2@-2.59,52.115 2.04,52.115 v1(2.1,52.175)
NetC85_1: C85.1 T1.3 | length 10.5
  TopLayer w0.4: T1.3@36.9,60.115 38.035,60.115 39.925,58.225 C85.1@46.625,58.225
NetC86_1: C86.1 T1.1 | length 10.2
  TopLayer w0.4: T1.1@36.775,57.525 38.2,57.525 39.25,56.475 C86.1@46.55,56.475
NetD5_2: D5.2 U23.11 | length 13.1
  TopLayer w0.125: D5.2@81.15,96.15 84.175,93.125 90.05,93.125 90.455,92.72 U23.11@90.455,90.325
NetD6_2: D6.2 U23.8 | length 12.9
  TopLayer w0.125: D6.2@91.675,96.15 91.675,94.375 94.85,91.2 94.85,87.05 93.325,85.525 U23.8@92.995,85.525
NetD7_2: D7.2 U23.10 | length 12.1
  TopLayer w0.125: D7.2@84,96.15 84,95.025 85.425,93.6 90.75,93.6 91.725,92.625 U23.10@91.725,90.325
NetD8_2: D8.2 U23.9 | length 9.7
  TopLayer w0.125: D8.2@87.65,96.2 87.65,94.7 88.375,93.975 91.2,93.975 92.995,92.18 U23.9@92.995,90.325
NetD9_2: D9.2 U23.5 | length 27.8
  TopLayer w0.125: U23.5@89.185,85.525 89.185,83.215 90.475,81.925 98.1,81.925 102.475,86.3 D9.2@102.475,96.2
NetD10_2: D10.2 U23.6 | length 22
  TopLayer w0.125: U23.6@90.455,85.525 90.455,83.445 90.95,82.95 95.575,82.95 98.775,86.15 D10.2@98.775,96.25
NetD11_2: D11.2 U23.12 | length 16
  TopLayer w0.125: D11.2@76.575,96.025 78.075,94.525 81.45,94.525 83.25,92.725 88.5,92.725 89.185,92.04 U23.12@89.185,90.325
NetD12_2: D12.2 U23.7 | length 18.1
  TopLayer w0.125: U23.7@91.725,85.525 91.725,83.7 91.975,83.45 93.925,83.45 96,85.525 96,95.125 D12.2@94.975,96.15
NetJ1_1: J1.1 R11.2 | length 3.3
  TopLayer w0.2: R11.2@113.35,90.225 113.35,90.275 113.35,92.675 J1.1@113.95,93.275
NetJ1_2: J1.2 U24.16 | length 7.7
  TopLayer w0.2: J1.2@116.45,93.275 116.45,92.8 118.075,91.175 U24.16@118.075,86.2
NetJ1_3: J1.3 U24.15 | length 9.6
  TopLayer w0.2: J1.3@116.425,95.275 J1.3@116.45,95.275 116.7,95.275 118.725,93.25 U24.15@118.725,86.75
NetP1_1: P1.1 R4.1 U1.H3 | length 77.7
  TopLayer w0.125: R4.1@42.675,39.875 42.675,34.525 43.925,33.275 56.9,33.275 57.975,34.35 57.975,40.475 61.675,44.175 78.225,44.175 v1(81.5,47.45) ; v2(89.9,57.775) U1.H3@90.4,57.275
  TopLayer w0.2: R4.1@42.8,39.925 P1.1@46.7,39.925
  BottomLayer w0.125: v1(81.5,47.45) 81.525,47.475 82.425,46.575 86.585,46.575 ; 86.475,46.575 86.585,46.575 ; v2(89.9,57.775) 88.9,56.775 88.9,47.461 88.014,46.575 86.585,46.575
NetP1_3: P1.3 R5.1 U1.J4 | length 62.8
  TopLayer w0.125: v2(90.9,58.775) U1.J4@91.4,58.275
  TopLayer w0.2: P1.3@49.24,39.975 49.24,37.26 49.5,37 R5.1@49.5,35.15
  BottomLayer w0.125: v1(49.225,37.275) 57.625,37.275 61.575,41.225 73.209,41.225 ; 73.05,41.225 73.209,41.225 ; 83.875,45.625 83.984,45.625 ; v2(90.9,58.775) 90.4,58.275 90.4,47.475 88.55,45.625 83.984,45.625 ; 73.209,41.225 77.975,41.225 82.375,45.625 83.984,45.625
NetP1_5: P1.5 U1.J5 | length 55
  TopLayer w0.125: P1.5@51.75,39.975 53.025,41.25 57.375,41.25 61.15,45.025 76.425,45.025 79.85,48.45 82.8,48.45 83.35,49 83.35,49.4 82.975,49.775 v1(82.975,49.825) ; v2(90.9,59.775) U1.J5@91.4,59.275
  BottomLayer w0.125: v1(82.975,49.825) 82.9,49.825 83.425,49.3 85.6,49.3 86.4,50.1 86.4,59.275 90.4,59.275 v2(90.9,59.775)
NetP1_9: P1.9 R6.1 U1.H4 | length 54.3
  TopLayer w0.125: P1.9@56.85,39.875 56.86,39.885 61.55,44.575 77.2,44.575 80.575,47.95 v1(80.525,47.95) ; v2(89.9,58.775) U1.H4@90.4,58.275
  TopLayer w0.2: R6.1@55.75,35.3 56.86,36.41 56.86,39.885 P1.9@56.86,39.975
  BottomLayer w0.125: v1(80.525,47.95) 80.575,47.95 80.85,48.225 81.525,48.225 82.875,46.875 87.925,46.875 88.4,47.35 88.4,58.275 89.4,58.275 v2(89.9,58.775)
NetP7_2: P7.1 U26.8 | length 9.6
  TopLayer w0.4: P7.1@-2.588,96.581 3.819,96.581 U26.8@6.1,94.3
NetR1_1: R1.1 U1.F4 | length 33.4
  TopLayer w0.125: R1.1@67.675,46.225 67.675,45.65 68.425,46.4 76.125,46.4 78.675,48.95 v1(81.55,48.95) ; v2(87.9,58.775) U1.F4@88.4,58.275
  BottomLayer w0.125: v1(81.55,48.95) 81.8,48.95 82.925,47.825 86.3,47.825 87.4,48.925 87.4,58.275 v2(87.9,58.775)
NetR8_1: R8.1 U3.48 | length 4
  TopLayer w0.2: R8.1@57.33,52.845 57.33,54.47 U3.48@57.33,56.837
NetR9_2: R9.2 U23.15 | length 6
  TopLayer w0.125: R9.2@81.1,92.225 85,92.225 85.375,91.85 U23.15@85.375,90.325
NetR10_2: R10.2 R11.1 U24.19 | length 9.8
  TopLayer w0.2: R10.2@110.425,89.7 111.763,88.362 116.125,88.362 ; U24.19@116.125,86.75 116.125,88.362 ; R11.1@116.125,90.3 116.125,88.362
NetR12_1: R12.1 U21.21 | length 5.5
  BottomLayer w0.2: R12.1@43.45,82.275 44.9,82.275 45.875,83.25 U21.21@48.5,83.25
NetR13_2: R13.2 U21.18 | length 2.9
  BottomLayer w0.2: R13.2@45.7,81.025 45.975,81.3 U21.18@48.5,81.3
NetT1_4: T1.4 U27.1 | length 30.9
  TopLayer w0.4: U27.1@7.325,60.875 7.325,58.025 8.3,57.05 28.8,57.05 31.865,60.115 T1.4@33.725,60.115
NetT2_4: T2.4 U28.2 | length 8
  TopLayer w0.2: T2.4@34.175,79.035 34.6,78.61
  TopLayer w0.5: U28.2@34.6,71.175 34.6,78.61
NetT3_1: T3.1 U22.16 | length 3
  TopLayer w0.2: T3.1@21.275,79.4 22.625,79.4 23.25,80.025 U22.16@24,80.025
NetT3_3: T3.3 U22.15 | length 2.5
  TopLayer w0.2: T3.3@22,81.75 23.225,80.525 U22.15@24,80.525
NetT3_6: T3.6 U26.1 | length 3.9
  TopLayer w0.2: U26.1@14.325,79.025 U26.1@14.675,79.375
  TopLayer w0.4: U26.1@14.675,79.375 T3.6@18.125,79.375
NetU1_T8: U1.T8 U25.3 | length 11.1
  TopLayer w0.125: U1.T8@98.4,62.275 98.42,62.255 U25.3@109.509,62.255
NetU27_8: U27.8 U28.4 | length 9.7
  TopLayer w0.2: U27.8@22.75,69.25 U27.8@22.775,69.275
  TopLayer w0.4: U27.8@22.775,69.275 U28.4@32.4,69.275
RFHI: T2.3 U22.3 | length 3.5
  TopLayer w0.2: U22.3@28,80.025 28.925,80.025 29.925,79.025 T2.3@31.1,79.025
RFLO: T2.1 U22.4 | length 3.5
  TopLayer w0.2: U22.4@28,80.525 28.95,80.525 30,81.575 T2.1@31,81.575 T2.1@31.05,81.575
SYNC_CLK: U1.A9 U3.82 | length 17.2
  TopLayer w0.125: U3.82@66.982,64.989 70.411,64.989 72.125,63.275 74.944,63.275 75.044,63.375 81.6,63.375 81.7,63.275 U1.A9@83.4,63.275
pads on no net: P1.7 P1.8 P3.A51 P3.A52 P3.A53 P3.A54 P3.A55 P3.A56 P3.B51 P3.B52 P3.B53 P3.B54 P3.B55 P3.B56 T1.5 T2.2 T2.5 T3.5 U13.4 U14.4 U15.4 U16.4 U17.4 U19.4 U21.15 U21.19 U21.23 U22.9 U23.14 U24.8 U24.24 U24.27 U24.28

## Polygon pours and split planes (outlines as drawn)
AGND on TopLayer "top_ground_Tx" (solid, pour order 1017): 35.5,20.775 39.9,20.775 39.9,6.575 35.5,6.575
AGND on TopLayer "top_ground_DDS" (solid, pour order 1016): 57.9,65.775 63.9,65.775 63.9,59.775 57.9,59.775
AGND on TopLayer "top_ground_left" (solid, remove dead copper, pour order 1014): -5.1,100.775 40.9,100.775 50.9,100.775 50.9,84.775 46.9,84.775 46.9,64.775 46.9,62.775 60.9,62.775 60.9,52.775 36.9,52.775 36.9,7.775 38.9,7.775 38.9,44.775 61.9,44.775 61.9,63.775 47.9,63.775 47.9,83.775 51.9,83.775 51.9,100.775 129.9,100.775 129.9,90.775 137.9,90.775 137.9,14.775 129.9,14.775 129.9,5.775 110.9,5.775 110.9,2.775 33.9,2.775 33.9,5.775 -5.1,5.775
3.3V_DIG on TopLayer "3.3V_DIG_1" (solid, pour order 1018): 128.1,40.275 128.1,36.575 125.9,36.575 125.9,40.275
2.5V_DIG on TopLayer "2.5V_DIG_1" (solid, pour order 1019): 122.4,9.275 122.4,6.975 118.5,6.975 118.5,9.275
1.8V_DIG on TopLayer "1.8V_DIG_1" (solid, pour order 1020): 107.4,9.775 107.4,5.575 103.7,5.575 103.8,5.675 103.8,9.775
3.3V_ANA on TopLayer "3.3V_ANA_1" (solid, pour order 1021): 29.6,12.275 29.6,9.775 26.3,9.775 26.3,12.175 26.2,12.275
1.8V_ANA on TopLayer "1.8V_ANA_1" (solid, pour order 1022): 15,12.175 15,8.375 12.1,8.375 12.1,12.175
5V on TopLayer "5V_1" (solid, pour order 1023): 0.9,12.175 0.9,6.975 -1.7,6.975 -1.7,12.175 0.9,12.175
3.3V_DIG on TopLayer "top_misc_3.3V" (solid, pour order 1001): 101.05,35.525 94.175,28.65 94.175,21 99.15,21 99.15,30.05 101.625,32.525 103.125,32.525 103.125,35.525
AGND on BottomLayer "bottom_ground_Tx" (solid, pour order 1013): 35.5,20.775 39.9,20.775 39.9,6.575 35.5,6.575
AGND on BottomLayer "bottom_ground_DDS" (solid, pour order 1011): 57.9,65.775 63.9,65.775 63.9,59.775 57.9,59.775
AGND on BottomLayer "bottom_ground_left" (solid, remove dead copper, pour order 1009): -5.1,100.775 40.9,100.775 50.9,100.775 50.9,84.775 46.9,84.775 46.9,64.775 46.9,62.775 60.9,62.775 60.9,52.775 36.9,52.775 36.9,7.775 38.9,7.775 38.9,44.775 61.9,44.775 61.9,63.775 47.9,63.775 47.9,83.775 51.9,83.775 51.9,100.775 129.9,100.775 129.9,90.775 137.9,90.775 137.9,14.775 129.9,14.775 129.9,5.775 110.9,5.775 110.9,2.775 33.9,2.775 33.9,5.775 -5.1,5.775
3.3V_DIG on BottomLayer "top_misc_3.3V" (solid, pour order 1000): 101.05,35.525 94.175,28.65 94.175,21 99.15,21 99.15,30.05 101.625,32.525 103.125,32.525 103.125,35.525
AGND on Ground "ground_ground_Tx" (solid, pour order 1007): 35.4,20.775 39.8,20.775 39.8,6.575 35.4,6.575
AGND on Ground "ground_ground_DDS" (solid, pour order 1005): 57.9,65.775 63.9,65.775 63.9,59.775 57.9,59.775
AGND on Ground "ground_ground_left" (solid, remove dead copper, pour order 1003): -5.1,100.775 40.9,100.775 50.9,100.775 50.9,84.775 46.9,84.775 46.9,64.775 46.9,62.775 60.9,62.775 60.9,52.775 36.9,52.775 36.9,7.775 38.9,7.775 38.9,44.775 61.9,44.775 61.9,63.775 47.9,63.775 47.9,83.775 51.9,83.775 51.9,100.775 129.9,100.775 129.9,90.775 137.9,90.775 137.9,14.775 129.9,14.775 129.9,5.775 110.9,5.775 110.9,2.775 33.9,2.775 33.9,5.775 -5.1,5.775
2.5V_DIG on Power "2.5V_DIG_plane1" (solid, pour order 1012): 117.4,18.275 122.7,18.275 122.7,6.575 117.4,6.575
1.8V_DIG on Power "1.8V_DIG_plane1" (solid, pour order 1010): 107.4,17.975 107.4,5.275 102.4,5.275 102.5,5.375 102.5,17.975
1.2V_DIG on Power "1.2V_DIG_plane1" (solid, pour order 1008): 116.4,52.275 129.9,52.275 129.9,46.475 116.4,46.475
3.3V_ANA on Power "3.3V_ANA_plane1" (solid, pour order 1004): 22.4,6.275 22.4,45.175 24,46.775 24.3,47.075 42.4,47.075 42.4,62.475 55.9,62.475 56.1,62.275 56.1,57.775 60.2,57.775 60.4,57.575 60.4,54.275 62.8,54.275 63.2,54.675 63.2,57.575 64.4,57.575 64.4,52.975 43.9,52.975 43.9,45.275 37.9,45.275 34.9,42.275 34.9,6.275
1.8V_ANA on Power "1.8V_ANA_plane1" (solid, pour order 1006): 6.9,6.275 6.9,52.375 40.4,52.375 40.4,64.575 56.1,64.575 57.1,64.575 57.1,58.875 62.6,58.875 62.6,54.575 61,54.575 61,58.175 60.9,58.275 56.6,58.275 56.6,62.375 56.2,62.775 56.1,62.875 53.7,62.875 41.4,62.875 41.4,48.275 24,48.275 21.7,45.975 21.1,45.375 21.1,6.275
5V on Power "5V_plane1" (solid, pour order 1002): -4.6,6.275 -4.6,99.775 39.7,99.775 39.7,52.975 5.737,52.975 5.737,6.275
3.3V_DIG on Power "3.3V_DIG_plane1" (solid, pour order 1015): 41.4,6.275 41.4,99.775 129.4,99.775 129.4,91.275 138.4,91.275 138.4,14.275 130.9,14.275 130.9,4.775 41.4,4.775

## Keep-outs
KeepOutLayer:
  lines w0.127: -5.8,5.462 6.165,5.462 6.165,4.827 33.216,4.827 33.216,-3.682 47.821,-3.682 47.821,4.192 49.599,4.192 49.599,-3.682 112.464,-3.682 112.464,4.827 131.65,4.827 131.65,13.717 139,13.717 139,91.822 130.35,91.822 130.35,101.075 -5.8,101.075 -5.8,93.092 -5.8,80.392 -5.8,5.462

## Other copper
TopLayer:
  text ".GTL" at 152.85,100.275 h2.29
Ground:
  text ".GND" at 152.9,103.375 h2.29
Power:
  text ".GPW" at 152.9,106.375 h2.29
BottomLayer:
  text ".GBL" at 161.725,103.45 h2.29

## Silkscreen, mask and mechanical layers (free items; w line width, h text height)
TopOverlay:
  text ".GTO" at 152.706,96.946 h2.29
  text "2014 RIKEN" at 131.7,90.175 h1.91 r270
  text "DDS BOARD" at 131.7,73.975 h1.91 r270
TopPaste:
  text ".GTP" at 152.675,93.625 h2.29
BottomPaste:
  text ".GBP" at 161.875,99.975 h2.29
TopSolder:
  rectangle: 32.835,-5.333 112.845,2.287
  text ".GTS" at 162.025,96.95 h2.29
BottomSolder:
  rectangle: 32.835,-5.333 112.845,2.287
  text ".GBS" at 162.025,93.8 h2.29
Mechanical1:
  lines w0.508: -7.5,-4.825 7.511,-4.825 7.511,2.668 8.273,3.43 32.48,3.43 33.267,2.643 33.267,-4.444 33.648,-4.825 47.389,-4.825 47.77,-4.444 47.77,2.49 49.65,2.49 49.65,-4.444 50.031,-4.825 112.032,-4.825 112.413,-4.444 112.413,2.643 113.201,3.43 141.05,3.43 141.05,101.855 -7.5,101.855 -7.5,-4.825
Mechanical4:
  circle w0.254: c32.598,-3.699 r2.54
  lines w0.203: 159.497,28.531 166.99,28.531 ; 161.402,66.377 169.213,66.377 ; 167.065,35.475 167.7,35.475 ; 167.117,26.626 167.117,35.516 ; 167.117,35.262 165.53,40.342 165.53,59.709 166.482,59.709 166.8,58.122 168.387,61.932 168.387,59.709 169.34,59.709 169.34,40.342 167.752,35.262 ; 167.752,26.626 167.752,35.516 ; 169.34,60.662 169.34,68.282 ; 169.975,41.612 176.96,67.012 ; 175.372,28.531 167.879,28.531 ; 183.811,62.442 176.472,65.113 ; 166.99,28.531 163.18,27.896 163.18,29.166 166.99,28.531 ; 167.879,28.531 171.689,27.896 171.689,29.166 167.879,28.531 ; 169.213,66.377 165.403,65.742 165.403,67.012 169.213,66.377 ; 176.472,65.113 179.835,63.213 180.269,64.407 176.472,65.113 ; 163.307,28.023 163.307,29.039 166.736,28.531 163.307,28.023 ; 163.434,28.15 163.434,28.912 166.482,28.531 163.434,28.15 ; 163.561,28.277 163.561,28.785 166.228,28.531 163.561,28.277 ; 163.688,28.404 165.974,28.531 163.688,28.658 163.688,28.404 ; 165.53,65.869 165.53,66.885 168.959,66.377 165.53,65.869 ; 165.657,65.996 165.657,66.758 168.705,66.377 165.657,65.996 ; 165.784,66.123 168.451,66.377 165.784,66.631 165.784,66.123 ; 165.911,66.25 168.197,66.377 165.911,66.504 165.911,66.25 ; 168.133,28.531 171.562,28.023 171.562,29.039 168.133,28.531 ; 168.387,28.531 171.435,28.15 171.435,28.912 168.387,28.531 ; 168.641,28.531 171.308,28.277 171.308,28.785 168.641,28.531 ; 168.895,28.531 171.181,28.404 171.181,28.658 168.895,28.531 ; 176.71,65.026 179.759,63.376 180.106,64.331 176.71,65.026 ; 176.949,64.939 179.683,63.539 179.943,64.255 176.949,64.939 ; 177.188,64.852 179.607,63.702 179.781,64.179 177.188,64.852 ; 177.426,64.766 179.531,63.864 179.618,64.103 177.426,64.766
  lines w0.254: 28.991,-5.045 28.991,-3.648 29.499,-4.918 28.991,-5.045 ; 28.996,-3.653 29.025,-2.285 29.542,-2.367 28.996,-3.653
  text "DETAIL A" at 157.91,73.362 h3.81
  text "o" at 175.055,67.329 h1.22
  text "20" at 170.927,64.789 h2.29
  text "0.38" at 176.96,27.261 h2.29
  text "board thickness" at 149.5,16.275 h3.81
  text "1.57+-0.18" at 149.5,10.075 h3.81
  text "units = mm" at 153.6,-1.225 h3.81
  text "SEE DETAIL A" at 10.026,-4.825 h1.91
DrillDrawing:
  text ".LEGEND" at 147.45,88.725 h2.29
  text "Drilling Details." at 147.45,84.925 h2.29

## Dimensions
-0.134,-5.333 to -7.5,-4.825 on Mechanical4
-8.008,0.001 to -7.5,-4.825 on Mechanical4

## Text inside footprints (layer, text, board x,y; h text height)
P1: TopOverlay "10" at 58.384,42.007 h1.27; TopOverlay "9" at 58.384,39.467 h1.27; TopOverlay "1" at 44.668,39.467 h1.27; TopOverlay "2" at 44.16,42.007 h1.27
P2: TopOverlay "10" at 58.284,29.707 h1.27; TopOverlay "9" at 58.284,27.167 h1.27; TopOverlay "1" at 44.568,27.167 h1.27; TopOverlay "2" at 44.06,29.707 h1.27
P3: TopOverlay "B1" at 33.47,3.557 h1.22; TopOverlay "B11" at 44.9,3.557 h1.22; TopOverlay "B14" at 49.98,3.557 h1.22; TopOverlay "B62" at 110.305,3.557 h1.22; BottomOverlay "A11" at 47.44,3.557 h1.22; BottomOverlay "A62" at 113.48,3.557 h1.22; BottomOverlay "A14" at 52.52,3.557 h1.22; BottomOverlay "A1" at 34.74,3.557 h1.22
P4: TopOverlay "2" at 74.94,97.043 h1.27 r180; TopOverlay "1" at 74.432,99.583 h1.27 r180; TopOverlay "7" at 63.256,99.583 h1.27 r180; TopOverlay "8" at 63.256,97.043 h1.27 r180
U3: TopOverlay "TOL" at 61.08,62.739 h1.27 r270; TopOverlay "VAL" at 61.08,62.739 h1.27 r270; TopOverlay "DEV" at 61.08,62.739 h1.27 r270; TopOverlay "PN" at 61.08,62.739 h1.27 r270; TopOverlay "*" at 66.961,69.679 h1.27 r270; Mechanical1 "RefDes2" at 61.08,62.739 h1.27 r270; Mechanical1 "*" at 66.961,69.679 h1.27 r270